# EAGLE board Proxmark3_Shield (EAGLE 5.11)
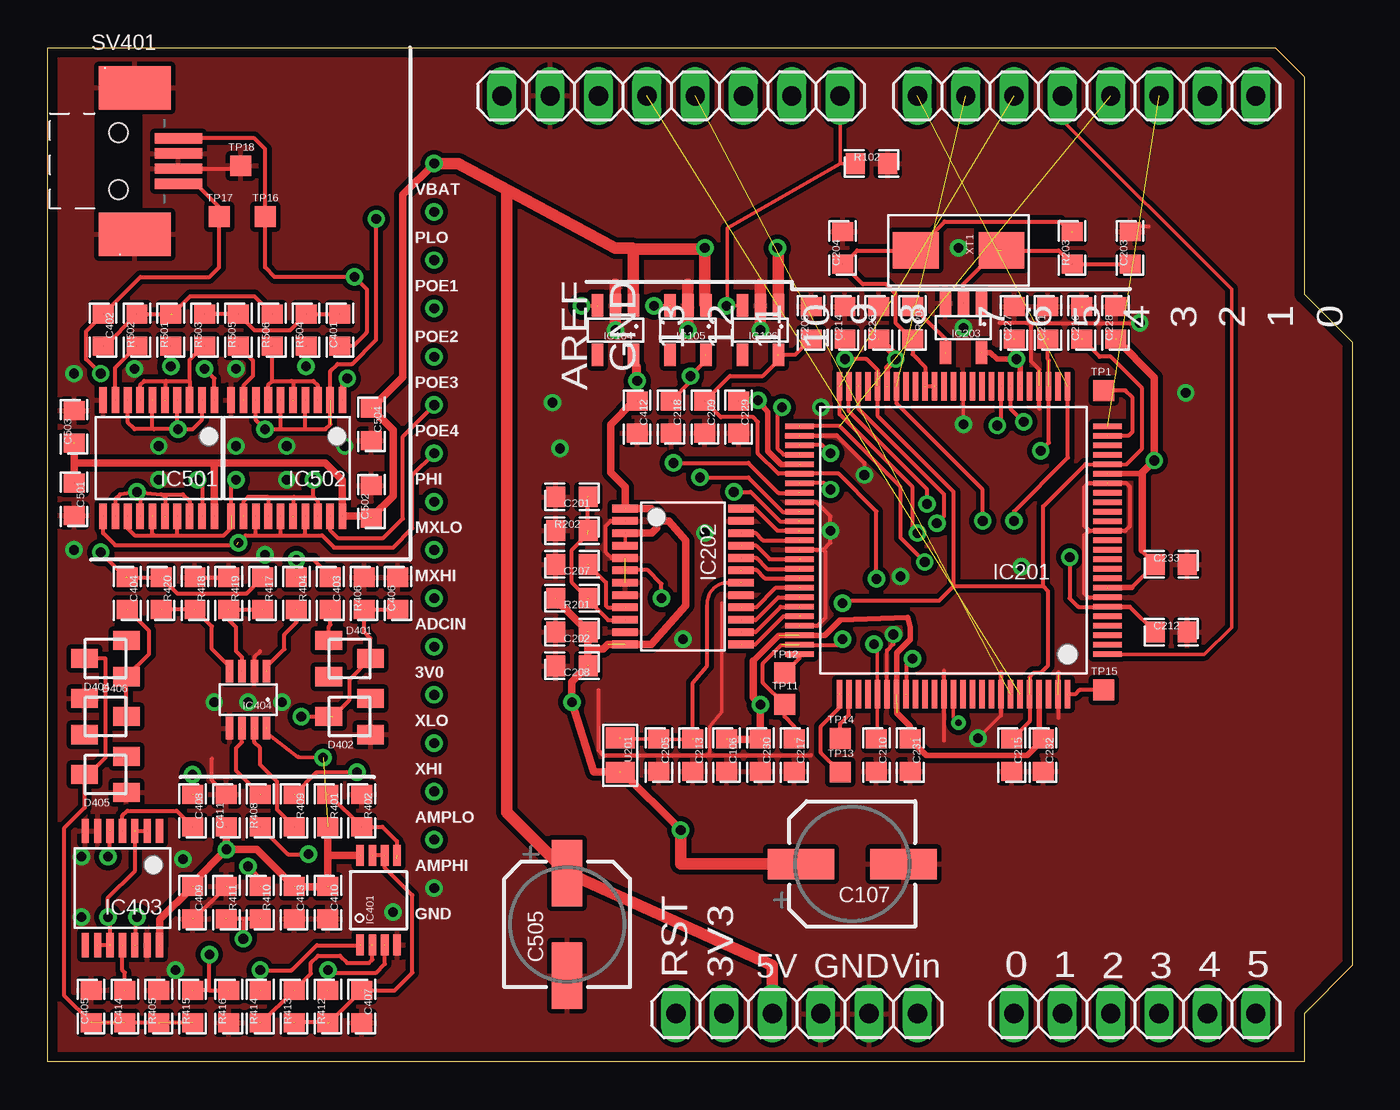
[diagram p0: board, top side]
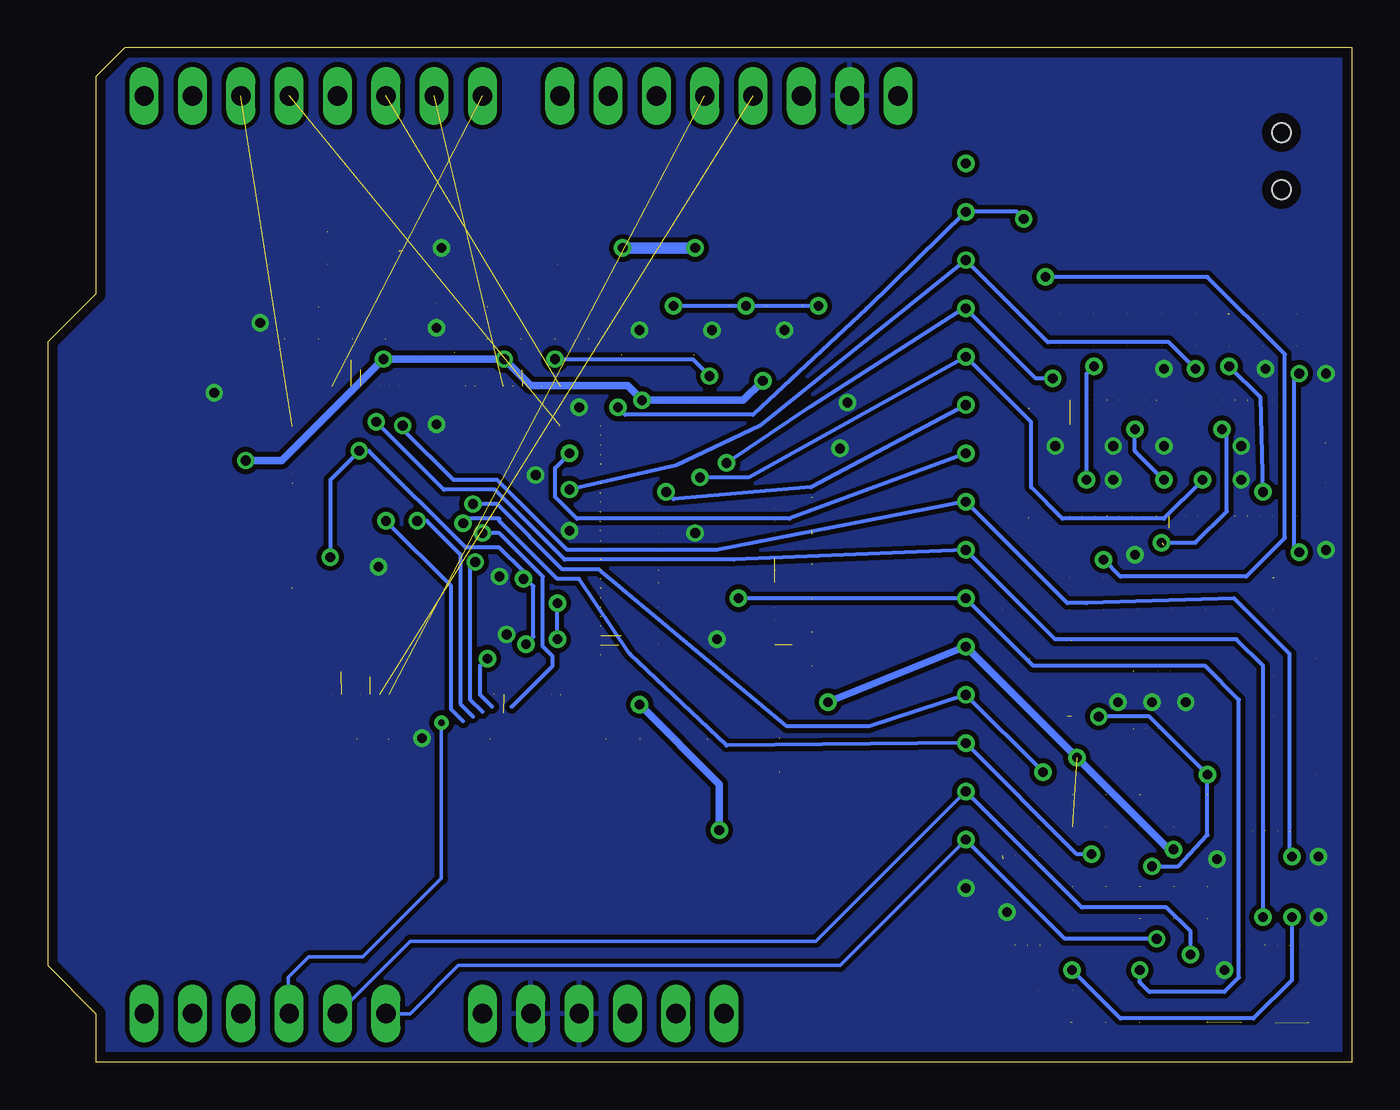
[diagram p1: board, bottom side, seen from below]

Size 68.58 x 53.34 mm. Coordinates in mm from the lower left corner, seen from the top.
Outline: 0,53.34 64.52,53.34 66.04,51.82 66.04,40.39 68.58,37.85 68.58,5.08 66.04,2.54 66.04,0 0,0 0,53.34
Copper layers (1*16): Top 0.0356mm / dielectric 1.5011mm / Bottom 0.0356mm
Design rules "SilverCircuits": minimum track width 7mil, minimum drill 14mil, track to track 7mil, track to pad 7mil, pad to pad 7mil, via to via 7mil, smd to smd 0mil, copper to edge 20mil, drill to drill 8mil, minimum pad ring 10mil, minimum via ring 8mil, stop-mask expansion 4mil, vias tented up to drill 0mil, thermal gap 10mil
Net classes: 1 power: width 0.305 mm

## Footprints (pad centres in the part's own frame; a part is rotated, then mirrored left to right if it is on the bottom)
0603 = smd 1 x 1.1: 1 -0.85,0; 2 0.85,0
153CLV-0605 = smd 3.5 x 1.6: + 2.7,0; - -2.7,0
SOT-23-3 = smd 1 x 1.4: 1 -0.95,-1.1; 2 0.95,-1.1; 3 0,1.1
SOT-23-5 = smd 0.6 x 1.2: 1 -0.95,-1.3; 2 0,-1.3; 3 0.95,-1.3; 4 0.95,1.3; 5 -0.95,1.3
VQ100 = smd 1.5 x 0.29: 1 -8.1,6; 2 -8.1,5.5; 3 -8.1,5; 4 -8.1,4.5; 5 -8.1,4; 6 -8.1,3.5; 7 -8.1,3; 8 -8.1,2.5; 9 -8.1,2; 10 -8.1,1.5; 11 -8.1,1; 12 -8.1,0.5; 13 -8.1,0; 14 -8.1,-0.5; 15 -8.1,-1; 16 -8.1,-1.5; 17 -8.1,-2; 18 -8.1,-2.5; 19 -8.1,-3; 20 -8.1,-3.5; 21 -8.1,-4; 22 -8.1,-4.5; 23 -8.1,-5; 24 -8.1,-5.5; 25 -8.1,-6; 51 8.1,-6; 52 8.1,-5.5; 53 8.1,-5; 54 8.1,-4.5; 55 8.1,-4; 56 8.1,-3.5; 57 8.1,-3; 58 8.1,-2.5; 59 8.1,-2; 60 8.1,-1.5; 61 8.1,-1; 62 8.1,-0.5; 63 8.1,0; 64 8.1,0.5; 65 8.1,1; 66 8.1,1.5; 67 8.1,2; 68 8.1,2.5; 69 8.1,3; 70 8.1,3.5; 71 8.1,4; 72 8.1,4.5; 73 8.1,5; 74 8.1,5.5; 75 8.1,6 | smd 0.29 x 1.5: 26 -6,-8.1; 27 -5.5,-8.1; 28 -5,-8.1; 29 -4.5,-8.1; 30 -4,-8.1; 31 -3.5,-8.1; 32 -3,-8.1; 33 -2.5,-8.1; 34 -2,-8.1; 35 -1.5,-8.1; 36 -1,-8.1; 37 -0.5,-8.1; 38 0,-8.1; 39 0.5,-8.1; 40 1,-8.1; 41 1.5,-8.1; 42 2,-8.1; 43 2.5,-8.1; 44 3,-8.1; 45 3.5,-8.1; 46 4,-8.1; 47 4.5,-8.1; 48 5,-8.1; 49 5.5,-8.1; 50 6,-8.1; 76 6,8.1; 77 5.5,8.1; 78 5,8.1; 79 4.5,8.1; 80 4,8.1; 81 3.5,8.1; 82 3,8.1; 83 2.5,8.1; 84 2,8.1; 85 1.5,8.1; 86 1,8.1; 87 0.5,8.1; 88 0,8.1; 89 -0.5,8.1; 90 -1,8.1; 91 -1.5,8.1; 92 -2,8.1; 93 -2.5,8.1; 94 -3,8.1; 95 -3.5,8.1; 96 -4,8.1; 97 -4.5,8.1; 98 -5,8.1; 99 -5.5,8.1; 100 -6,8.1
TSSOP24 = smd 0.4 x 1.35: 1 -3.575,-3.05; 2 -2.925,-3.05; 3 -2.275,-3.05; 4 -1.625,-3.05; 5 -0.975,-3.05; 6 -0.325,-3.05; 7 0.325,-3.05; 8 0.975,-3.05; 9 1.625,-3.05; 10 2.275,-3.05; 11 2.925,-3.05; 12 3.575,-3.05; 13 3.575,3.05; 14 2.925,3.05; 15 2.275,3.05; 16 1.625,3.05; 17 0.975,3.05; 18 0.325,3.05; 19 -0.325,3.05; 20 -0.975,3.05; 21 -1.625,3.05; 22 -2.275,3.05; 23 -2.925,3.05; 24 -3.575,3.05
MSOP8 = smd 0.4 x 1.1: 1 -0.975,-2.35; 2 -0.325,-2.35; 3 0.325,-2.35; 4 0.975,-2.35; 5 0.975,2.35; 6 0.325,2.35; 7 -0.325,2.35; 8 -0.975,2.35
TSSOP14 = smd 0.381 x 1.27: 1 -1.95,-3; 2 -1.3,-3; 3 -0.65,-3; 4 0,-3; 5 0.65,-3; 6 1.3,-3; 7 1.95,-3; 8 1.95,3; 9 1.3,3; 10 0.65,3; 11 0,3; 12 -0.65,3; 13 -1.3,3; 14 -1.95,3
SOT-23-8 = smd 0.4 x 1.2: 1 -0.975,-1.5; 2 -0.325,-1.5; 3 0.325,-1.5; 4 0.975,-1.5; 5 0.975,1.5; 6 0.325,1.5; 7 -0.325,1.5; 8 -0.975,1.5
TSSOP20 = smd 0.4 x 1.35: 1 -2.925,-3.05; 2 -2.275,-3.05; 3 -1.625,-3.05; 4 -0.975,-3.05; 5 -0.325,-3.05; 6 0.325,-3.05; 7 0.975,-3.05; 8 1.625,-3.05; 9 2.275,-3.05; 10 2.925,-3.05; 11 2.925,3.05; 12 2.275,3.05; 13 1.625,3.05; 14 0.975,3.05; 15 0.325,3.05; 16 -0.325,3.05; 17 -0.975,3.05; 18 -1.625,3.05; 19 -2.275,3.05; 20 -2.925,3.05
HIROSE-MQ172 = smd 0.55 x 2.5: 1 -1.2,6.75; 2 -0.4,6.75; 3 0.4,6.75; 4 1.2,6.75 | smd 2.3 x 3.8: M1 3.85,4.45; M2 -3.85,4.45 | hole 1: 1.5,3.6; -1.5,3.6
TP06SQ = smd 1.1 x 1.1: TP 0,0
0805 = smd 1.1 x 1.5: 1 -0.9,0; 2 0.9,0
1X06 = drill 1.016 long: 1 -6.35,0; 2 -3.81,0; 3 -1.27,0; 4 1.27,0; 5 3.81,0; 6 6.35,0
1X08 = drill 1.016 long: 1 -8.89,0; 2 -6.35,0; 3 -3.81,0; 4 -1.27,0; 5 1.27,0; 6 3.81,0; 7 6.35,0; 8 8.89,0
6035 = smd 2.4 x 1.9: 1 -2.25,0; 2 2.25,0

## Placement (x,y rotation side)
C106  4u7  [0603]  35.69,16.13 270 top
C107  100u  [153CLV-0605]  42.29,10.41 180 top
C201  DNP  [0603]  27.56,29.72 180 top
C202  1u  [0603]  27.56,22.61 180 top
C203  22p  [0603]  56.9,42.8 90 top
C204  22p  [0603]  41.78,42.8 90 top
C205  1u  [0603]  32.13,16.13 270 top
C206  4u7  [0603]  40.13,38.86 90 top
C207  100n  [0603]  27.56,26.16 180 top
C208  100n  [0603]  27.56,20.83 180 top
C209  100n  [0603]  34.54,33.91 270 top
C210  100n  [0603]  43.56,16.13 270 top
C211  100n  [0603]  52.58,38.86 90 top
C212  100n  [0603]  59.05,22.61 0 top
C213  100n  [0603]  33.91,16.13 270 top
C214  100n  [0603]  41.91,38.86 90 top
C215  100n  [0603]  50.67,16.13 270 top
C216  100n  [0603]  54.36,38.86 90 top
C217  100n  [0603]  39.24,16.13 270 top
C218  4u7  [0603]  32.77,33.91 270 top
C226  100n  [0603]  43.69,38.86 90 top
C227  100n  [0603]  50.8,38.86 90 top
C228  100n  [0603]  56.13,38.86 90 top
C229  100n  [0603]  36.32,33.91 270 top
C230  100n  [0603]  37.47,16.13 270 top
C231  100n  [0603]  45.34,16.13 270 top
C232  100n  [0603]  52.32,16.13 270 top
C233  100n  [0603]  59.05,26.16 0 top
C401  1n  [0603]  15.37,38.48 90 top
C402  47p  [0603]  2.92,38.48 270 top
C403  0R  [0603]  14.86,24.64 270 top
C404  22p  [0603]  4.19,24.64 270 top
C405  130p  [0603]  2.29,2.92 90 top
C406  1n  [0603]  18.41,24.64 90 top
C407  1u  [0603]  16.51,2.92 270 top
C408  1n  [0603]  7.62,13.21 270 top
C409  100n  [0603]  7.62,8.38 270 top
C410  100n  [0603]  14.73,8.38 270 top
C411  100n  [0603]  9.4,13.21 90 top
C412  4u7  [0603]  30.99,33.91 270 top
C413  4u7  [0603]  12.95,8.38 270 top
C414  1n  [0603]  4.06,2.92 90 top
C501  100n  [0603]  1.4,29.59 270 top
C502  100n  [0603]  17.02,29.46 90 top
C503  4u7  [0603]  1.4,33.4 90 top
C504  4u7  [0603]  17.02,33.53 270 top
C505  100u  [153CLV-0605]  27.3,7.24 90 top
D401  BAS21  [SOT-23-3]  15.88,21.21 270 top
D402  BZX84C47  [SOT-23-3]  15.88,18.16 90 top
D404  BAR18  [SOT-23-3]  3.05,21.21 90 top
D405  BZX84C47  [SOT-23-3]  3.05,15.11 90 top
D406  BAR18  [SOT-23-3]  3.05,18.16 270 top
IC104  MCP1824T-300  [SOT-23-5]  29.84,38.48 180 top
IC105  MCP1824T-250  [SOT-23-5]  33.66,38.48 180 top
IC106  MCP1824T-120  [SOT-23-5]  37.47,38.48 180 top
IC201  XC3S250EVQ100  [VQ100]  47.61,27.43 180 top
IC202  ADC08060  [TSSOP24]  33.4,25.53 270 top
IC203  7404  [SOT-23-5]  48.13,38.61 180 top
IC401  AD8052  [MSOP8]  17.4,8.51 0 top
IC403  CD4066  [TSSOP14]  3.94,9.14 180 top
IC404  TLV3502  [SOT-23-8]  10.54,19.05 180 top
IC501  74AC244  [TSSOP20]  5.84,31.75 180 top
IC502  74AC244  [TSSOP20]  12.57,31.75 180 top
R102  10k  [0603]  43.31,47.24 0 top
R201  DNP  [0603]  27.56,24.38 180 top
R202  0R  [0603]  27.56,27.94 0 top
R203  1M  [0603]  53.85,42.8 90 top
R204  100R  [0603]  45.47,38.86 270 top
R401  100K  [0603]  14.73,13.21 270 top
R402  100K  [0603]  16.51,13.21 270 top
R404  240K  [0603]  13.08,24.64 270 top
R405  10k  [0603]  5.84,2.92 90 top
R406  510K  [0603]  16.64,24.64 90 top
R408  1K  [0603]  11.18,13.21 90 top
R409  1K  [0603]  12.95,13.21 270 top
R410  10M  [0603]  11.18,8.38 270 top
R411  240K  [0603]  9.4,8.38 270 top
R412  100K  [0603]  14.73,2.92 90 top
R413  10K  [0603]  12.95,2.92 90 top
R414  10K  [0603]  11.18,2.92 90 top
R415  10M  [0603]  7.62,2.92 90 top
R416  1M  [0603]  9.53,2.92 90 top
R417  240K  [0603]  11.3,24.64 270 top
R418  0R  [0603]  7.75,24.64 270 top
R419  0R  [0603]  9.53,24.64 270 top
R420  240K  [0603]  5.97,24.64 270 top
R501  33R  [0603]  6.48,38.48 90 top
R502  10K  [0603]  4.7,38.48 90 top
R503  33R  [0603]  8.26,38.48 90 top
R504  33R  [0603]  13.59,38.48 90 top
R505  10K  [0603]  10.03,38.48 90 top
R506  33R  [0603]  11.81,38.48 90 top
SV401  HIROSE  [HIROSE-MQ172]  0.13,47.37 270 top
TP1  TPTP06SQ  [TP06SQ]  55.5,35.31 0 top
TP11  TPTP06SQ  [TP06SQ]  38.73,18.8 0 top
TP12  TPTP06SQ  [TP06SQ]  38.73,20.45 0 top
TP13  TPTP06SQ  [TP06SQ]  41.66,15.24 0 top
TP14  TPTP06SQ  [TP06SQ]  41.66,17.02 0 top
TP15  TPTP06SQ  [TP06SQ]  55.5,19.56 0 top
TP16  TPTP06SQ  [TP06SQ]  11.43,44.45 0 top
TP17  TPTP06SQ  [TP06SQ]  9.02,44.45 0 top
TP18  TPTP06SQ  [TP06SQ]  10.16,47.12 0 top
U201  FB  [0805]  30.1,16.13 270 top
U$1  POWER  [1X06]  39.37,2.54 0 top
U$3  DIGITAL_0_7  [1X08]  54.61,50.8 0 top
U$4  DIGITAL_8_13  [1X08]  32.77,50.8 0 top
WIN3  ANALOG  [1X06]  57.15,2.54 0 top
XT1  13.56MHz  [6035]  47.88,42.67 180 top

## Library data of the parts
C106 C107 C201-C218 C226-C233 C401-C414 C501-C505 D401 D402 D404-D406 IC104-IC106 IC201-IC203 IC401 IC403 IC404 IC501 IC502 R102 R201-R204 R401 R402 R404-R406 R408-R420 R501-R506 SV401 TP1 TP11-TP18 U201 XT1 = proxmark
U$1 U$3 U$4 WIN3 = arduino

## Nets
13.56MHZ: C204.1 IC201.40 IC201.41 R203.2 R204.2 XT1.2
+1V2: C206.1 C209.1 C210.1 C211.1 C212.1 IC106.5 IC201.6 IC201.28 IC201.56 IC201.80
+2V5: C214.1 C215.1 C216.1 C217.1 C218.1 IC105.5 IC201.21 IC201.46 IC201.74 IC201.96 TP11.TP
+3V0: C106.1 C107.+ C202.1 C208.1 C226.1 C227.1 C228.1 C229.1 C230.1 C231.1 C232.1 C233.1 C409.1 C410.1 C411.1 C412.1 C413.1 IC104.5 IC201.8 IC201.20 IC201.31 IC201.45 IC201.55 IC201.73 IC201.82 IC201.97 IC202.1 IC202.3 IC202.4 IC202.12 IC203.5 IC401.8 IC403.14 IC404.8 R201.2 R401.2 U201.2
+VBAT [power]: C501.1 C502.1 C503.1 C504.1 C505.+ IC104.1 IC105.1 IC106.1 IC501.20 IC502.20 U$1.3
+VBIAS: C407.1 IC401.6 IC401.7 R412.1 R413.1
ADC0: IC201.63 IC202.22
ADC1: IC201.65 IC202.21
ADC2: IC201.66 IC202.20
ADC3: IC201.67 IC202.19
ADC4: IC201.68 IC202.16
ADC5: IC201.69 IC202.15
ADC6: IC201.70 IC202.14
ADC7: IC201.71 IC202.13
ADC_CLK: IC201.62 IC202.24
ADC_IN: IC202.6 IC401.1 R414.2
ADCDR_HI: C405.1 C414.1 D404.3 D405.3 R405.1 R415.1
ADCDR_LO: C406.1 C408.1 D401.3 D402.3 R406.1 R410.1
AMP_HI: R415.2 R416.2 WIN3.2
AMP_LO: R410.2 R411.2 WIN3.1
ANT_HI_DRV: C402.2 R501.2 R502.2 R506.2
ANT_LO_DRV: C401.2 R503.2 R504.2 R505.2
CROSS_HI: IC201.48 R408.1
CROSS_LO: IC201.49 R409.1
DEBUG: IC201.24 TP1.TP
FPGA_CCLK: IC201.50 U$3.3
FPGA_DIN: IC201.44 U$3.2
FPGA_DONE: IC201.51 U$3.5
FPGA_DOUT: IC201.26 U$3.1
FPGA_INITB: IC201.25 U$3.6
FPGA_PROGB: IC201.1 U$3.4
FPGA_TCK: IC201.77 TP14.TP
FPGA_TDI: IC201.100 TP15.TP
FPGA_TDO: IC201.76 TP13.TP
FPGA_TMS: IC201.75 TP12.TP
GND: C106.2 C107.- C201.2 C202.2 C203.2 C204.2 C205.2 C206.2 C207.2 C208.2 C209.2 C210.2 C211.2 C212.2 C213.2 C214.2 C215.2 C216.2 C217.2 C218.2 C226.2 C227.2 C228.2 C229.2 C230.2 C231.2 C232.2 C233.2 C405.2 C406.2 C407.2 C409.2 C410.2 C411.2 C412.2 C413.2 C501.2 C502.2 C503.2 C504.2 C505.- D402.1 D405.1 D406.1 IC104.2 IC105.2 IC106.2 IC201.7 IC201.14 IC201.19 IC201.29 IC201.37 IC201.52 IC201.59 IC201.64 IC201.72 IC201.81 IC201.87 IC201.93 IC201.99 IC202.2 IC202.5 IC202.7 IC202.8 IC202.11 IC202.17 IC202.23 IC203.3 IC401.4 IC403.6 IC403.7 IC403.13 IC404.2 IC404.5 IC501.10 IC502.10 R102.2 R202.1 R402.1 R405.2 R406.2 R411.1 R416.1 R418.1 R419.1 SV401.2 SV401.3 SV401.M1 SV401.M2 TP18.TP U$1.4 U$1.5 U$4.2
MISO: IC201.95 U$4.4
MOSI: IC201.94 U$4.5
MUX_HI: IC201.32 IC403.12
MUX_LO: IC201.33 IC403.5
N$1: C207.1 IC202.9
N$3: IC203.4 R204.1
N$4: C203.1 IC203.2 R203.1 XT1.1
N$9: C201.1 IC202.10 R201.1 R202.2
N$11: U$3.7
N$14: IC401.5 R401.1 R402.2
N$16: C414.2 IC403.11
N$17: C401.1 C403.1 R404.1 SV401.1 TP16.TP
N$20: C404.2 D404.1 D406.3
N$23: IC404.1 R404.2
N$24: IC404.7 R409.2
N$25: IC401.3 IC403.2 IC403.3 IC403.9 IC403.10 R412.2
N$28: IC404.6 R408.2
N$29: IC404.3 R417.2 R419.2
N$30: C403.2 D401.1
N$32: C408.2 IC403.4
N$33: IC501.12 IC501.14 IC501.16 IC501.18 R501.1
N$34: IC502.12 IC502.14 IC502.16 IC502.18 R504.1
N$40: IC404.4 R418.2 R420.2
N$41: IC501.3 IC501.5 IC501.7 R503.1
N$42: IC502.3 IC502.5 IC502.7 R506.1
N$43: C402.1 C404.1 R417.1 R420.1 SV401.4 TP17.TP
N$44: IC501.9 R502.1
N$45: IC502.9 R505.1
N$52: IC401.2 R413.2 R414.1
NCS0: IC201.91
PCK0: IC201.88 WIN3.3
PWR_HI: IC201.53 IC501.2 IC501.4 IC501.6 IC501.8 IC501.11 IC502.13 IC502.15 IC502.17
PWR_LO: IC201.54 IC501.13 IC501.15 IC501.17 IC502.2 IC502.4 IC502.6 IC502.8 IC502.11
PWR_OE1: IC201.57 IC501.1
PWR_OE2: IC201.58 IC502.1
PWR_OE3: IC201.60 IC501.19
PWR_OE4: IC201.61 IC502.19
PWR_ON: IC104.3 IC105.3 IC106.3 R102.1 U$4.8
SCK: U$4.3
SPCK: IC201.90
SS: U$4.6
SSP_CLK: IC201.85
SSP_DIN: IC201.83
SSP_DOUT: IC201.79
SSP_FRAME: IC201.84
VDD: C205.1 C213.1 IC202.18 U201.1

## Tracks (layer width: path | path; a pad name or v marks a point on that pad's centre or on a via)
13.56MHZ  (6 unrouted)
  Top 0.203: 46.63,35.53 46.13,35.53 46.13,36.55 45.47,37.21 45.47,38.02 45.41,38.02 44.58,38.86 44.58,40.39 44.07,40.89 42.85,40.89 C204.1 41.83,41.96 42.55,42.67 45.62,42.67 47.14,44.2 53.21,44.2 53.77,43.64 53.85,43.64
+1V2  (via drill 0.51)  (5 unrouted)
  Top 0.178: IC201.56 39.37,30.94 | C210.1 43.61,16.98 IC201.80 43.61,21.79 arc90 v43.43,21.97
  Top 0.203: 38.41,37.19 39.29,37.19 40.13,38.02 40.18,38.02 | 38.41,37.19 38.38,37.21 | v43.43,21.97 43.64,21.77 | v53.72,26.54 53.72,24.38 54.18,23.93 56.88,23.93 | v52.2,32.13 52.63,32.56 52.63,36.91 52.58,36.96 52.58,38.02 | v43.56,25.4 43.56,28.96 41.58,30.94 39.37,30.94 38.41,30.94 37.34,32 37.34,33.66 37.08,33.91 35.38,33.91 34.54,34.75 35.87,36.07 37.59,36.07 38.41,36.88 38.41,37.19 | 56.88,23.93 C212.1 | IC201.6 56.88,23.93
  Bottom 0.203: v53.72,26.54 53.72,30.61 v52.2,32.13 51.69,32.13 46.61,27.05 44.83,27.05 43.56,25.78 v43.56,25.4 43.05,25.02 43.05,22.35 v43.43,21.97
+2V5  (via drill 0.51)  (9 unrouted)
  Top 0.178: 54.53,31.42 56.69,31.42 IC201.21
  Top 0.203: 50.67,16.97 51.61,17.91 51.61,20.24 51.82,20.45 52.2,20.45 52.58,20.83 52.58,24.77 52.32,25.02 | 54.53,38.02 54.36,38.02 55.3,37.08 55.88,37.08 57.53,35.43 57.53,32.26 56.69,31.42 | v41.78,22.23 41.48,21.92 38.56,21.92 37.59,20.95 37.59,19.94 TP11.TP 38.73,18.16 39.24,17.65 39.24,16.97 | 54.53,31.42 52.32,29.21 52.32,25.02 | 47.62,25.02 52.32,25.02 | 47.62,25.02 47.62,29.97 43.64,33.96 43.64,36.37 43.05,36.96 v41.91,36.96 41.91,38.02 | 32.77,34.75 33.78,35.76 v33.78,36.07 34.59,36.88 34.59,37.19 | 47.62,25.02 46.86,24.26 42.04,24.26 v41.78,24.13
  Bottom 0.203: v41.78,22.23 v41.78,24.13 | v41.91,36.96 34.67,36.96 v33.78,36.07
+3V0  (via drill 0.51)  (34 unrouted)
  Top 0.178: 30.35,27.81 IC202.3 IC202.4 | v30.99,35.81 30.8,36.01 IC104.5
  Top 0.203: 52.32,16.97 52.12,17.17 | 11.51,17.55 11.51,17.32 13.16,16.05 v14.48,16 | 56.97,24.94 56.99,24.94 C233.1 57.53,26.84 57.53,26.92
  Top 0.279: 52.32,16.97 51.49,16.13 46.18,16.13 45.34,16.97 45.34,17.65 44.63,18.36 44.63,21.51 45.34,22.23 45.34,22.86 45.21,23.37 41.66,23.24 40.84,22.43 38.43,22.43 37.08,21.08 | 52.12,17.17 52.12,19.33 | 44.12,36.5 IC201.45 | 51.13,36.75 51.13,35.53 | 56.97,24.94 55.73,24.94 | 39.52,31.42 38.56,31.42 37.85,32.13 37.85,34.16 37.39,34.75 | v37.34,34.8 37.39,34.75 | IC203.5 49.55,37.31 49.91,36.96 v50.93,36.96 | 37.39,34.75 36.32,34.75 | 57.48,30.94 55.73,30.94
  Top 0.305: v44.58,36.96 44.12,36.5
  Top 0.406: 50.8,38.02 50.8,37.08 v50.93,36.96 51.13,36.75 | 37.08,21.08 37.08,19.18 v37.47,18.8 37.47,16.97 35.69,16.97 | 30.35,27.81 31.75,27.81 32,28.07 32,28.45 | 32,28.45 32,28.83 31.73,29.11 IC202.1 30.35,30.23 29.59,30.99 29.59,33.53 30.81,34.75 30.99,34.75 v30.99,35.81 30.99,36.58 30.79,36.78 IC104.5 | 56.13,38.02 58.17,35.99 v58.17,31.62 57.53,30.99 | R201.2 26.72,24.31 28.4,22.63 28.4,21.72 | 28.4,21.72 28.4,20.83 27.56,19.99 v27.56,18.92 28.7,15.24 U201.2 30.1,15.37 v33.27,12.19 | 28.4,21.72 29.21,21.72 29.44,21.95 31.73,21.95 33.53,24 33.53,27.43 32.64,28.45 32,28.45 | v44.58,36.96 44.58,37.13 43.69,38.02 | IC403.14 5.89,7.49 C409.1 7.62,9.4 v9.4,11.18 | 14.73,10.79 C410.1 C413.1 11,11.18 v9.4,11.18 | 14.73,10.79 R401.2 | 16.43,10.87 14.81,10.87 14.73,10.79 | v9.4,11.18 C411.1 | 57.53,30.99 57.53,26.92 | 57.53,30.99 57.48,30.94
  Top 0.61: C107.+ 33.27,10.41 v33.27,12.19
  Bottom 0.406: v58.17,31.62 56.26,31.62 v50.93,36.96 v44.58,36.96 43.18,35.56 38.1,35.56 v37.34,34.8 32,34.8 v30.99,35.81 | v33.27,12.19 33.27,14.61 v37.47,18.8 | v27.56,18.92 v20.32,21.84 9.65,11.18 v9.4,11.18
+VBAT  (via drill 0.51)  (8 unrouted)
  Top 0.305: 14.61,31.5 8.89,31.5 arc90 8.76,31.37 | 30.73,42.8 arc-90 30.79,42.75 | 34.49,42.75 arc90 v34.54,42.8 | 34.54,39.84 arc90 IC105.1 | 24.13,45.72 24.2,45.78 24.2,45.84
  Top 0.406: 1.4,30.43 1.4,31.5 | 1.4,31.5 1.4,32.56 | v20.32,47.24 18.67,45.59 18.67,36.02 17.02,34.37 18.16,33.22 18.16,29.77 17.02,28.63 16.94,28.7 IC502.20 15.49,30.61 14.61,31.5 1.4,31.5 | v38.35,42.8 38.41,42.75 | 8.76,31.37 IC501.20
  Top 0.61: IC104.1 30.79,42.75 34.49,42.75 | 38.41,42.75 38.41,39.78 | v20.32,47.24 21.59,47.24 24.2,45.84 29.84,42.8 30.73,42.8 | U$1.3 38.1,5.08 C505.+ 24.13,13.11 24.13,45.72 | v34.54,42.8 34.54,39.84
  Bottom 0.61: v34.54,42.8 v38.35,42.8
+VBIAS  (5 unrouted)
  Top 0.203: 17.07,10.87 17.73,10.87 17.73,10.21 19.18,8.76 19.18,4.7 18.24,3.76 16.51,3.76 14.83,2.08 12.95,2.08
ADC0  (2 unrouted)
  Top 0.203: 39.52,27.43 37.59,27.43 37.21,27.81 36.45,27.81
ADC1  (2 unrouted)
  Top 0.203: 39.52,26.44 37.95,26.44 37.24,27.15 IC202.21
ADC2  (2 unrouted)
  Top 0.203: 39.52,25.93 37.82,25.93 37.26,26.49 IC202.20
ADC3  (2 unrouted)
  Top 0.203: 39.52,25.43 37.69,25.43 37.26,25.86 IC202.19
ADC4  (2 unrouted)
  Top 0.203: 39.52,24.94 38.28,24.94 37.24,23.9 IC202.16
ADC5  (2 unrouted)
  Top 0.203: 39.52,24.43 38.41,24.43 37.21,23.24 IC202.15
ADC6  (2 unrouted)
  Top 0.203: 39.52,23.93 38.53,23.93 37.21,22.61 IC202.14
ADC7  (2 unrouted)
  Top 0.203: 39.52,23.44 38.68,23.44 37.19,21.95 IC202.13
ADC_CLK  (2 unrouted)
  Top 0.203: 39.52,27.94 38.35,27.94 37.19,29.11 IC202.24
ADC_IN  (via drill 0.51)  (3 unrouted)
  Top 0.203: IC202.6 31.55,25.86 32.26,25.15 v32.26,24.38 | 11.18,3.76 v11.18,4.83 12.83,4.83 14.15,6.15 16.43,6.15
  Bottom 0.203: v11.18,4.83 11.18,4.19 10.67,3.68 6.73,3.68 5.97,4.45 5.97,19.05 7.75,20.83 16.76,20.83 v20.32,24.38 v32.26,24.38
ADCDR_HI  (6 unrouted)
  Top 0.203: D404.3 3.05,21.21 3.05,16 2.16,15.11 D405.3 1.96,13.39 0.89,12.32 0.89,3.48 2.29,2.08 7.62,2.08
ADCDR_LO  (via drill 0.51)  (6 unrouted)
  Top 0.203: v13.34,18.16 14.99,18.16 15.88,19.05 15.88,20.12 16.97,21.21 | C406.1 R406.1 16.64,22.61 16.97,22.28 16.97,21.21 | 16.97,21.21 17.02,21.26 16.84,21.26 | v7.62,15.11 7.62,14.05 | R410.1 11.18,9.65 v10.54,10.29
  Bottom 0.203: v13.34,18.16 10.67,18.16 v7.62,15.11 7.62,11.94 9.14,10.29 v10.54,10.29
AMP_HI  (via drill 0.51)  (2 unrouted)
  Top 0.203: 8.51,3.76 9.53,3.76 | 8.51,3.76 7.62,3.76 | 8.51,3.76 v8.51,5.65
  Bottom 0.178: v20.32,14.22 28.19,6.35 49.53,6.35 WIN3.2
  Bottom 0.203: v8.51,5.65 8.51,6.86 9.78,8.13 14.22,8.13 v20.32,14.22
AMP_LO  (via drill 0.51)  (2 unrouted)
  Top 0.203: 9.4,7.54 10.29,7.54 | 10.29,7.54 11.18,7.54 | 10.29,7.54 v10.29,6.48
  Bottom 0.178: v20.32,11.68 26.92,5.08 46.99,5.08 49.53,2.54 WIN3.1
  Bottom 0.203: v20.32,11.68 15.11,6.48 v10.29,6.48
ANT_HI_DRV  (4 unrouted)
  Top 0.203: R506.2 10.87,40.26 7.49,40.26 6.55,39.32 R502.2 3.02,37.64 2.92,37.64
ANT_LO_DRV  (4 unrouted)
  Top 0.203: R503.2 R505.2 10.87,38.48 12.75,38.48 R504.2 C401.2
CROSS_HI  (via drill 0.51)  (2 unrouted)
  Top 0.203: 42.62,35.53 42.62,34.34 47.12,29.84 47.12,28.7 v46.74,28.32 | R408.1 12.62,10.92 v13.72,10.92
  Bottom 0.203: v46.74,28.32 46.48,28.57 44.83,28.57 44.83,28.45 41.78,25.4 40.64,25.4 37.97,21.46 32.89,16.64 v20.32,16.76 14.48,10.92 v13.72,10.92
CROSS_LO  (via drill 0.51)  (2 unrouted)
  Top 0.203: IC201.49 42.11,34.21 46.23,30.1 v46.23,29.34 | v16.26,15.24 14.15,15.24 12.95,14.05
  Bottom 0.203: v46.23,29.34 44.96,29.34 41.53,25.91 39.62,25.91 29.72,17.65 25.4,17.65 v20.32,19.3 v16.26,15.24
DEBUG  (1 unrouted)
  Top 0.203: 55.73,32.94 56.82,32.94 57.02,33.15 57.02,34.92 56.64,35.31 TP1.TP
FPGA_CCLK  (via drill 0.51)  (2 unrouted)
  Top 0.203: 41.63,35.53 41.63,34.06 45.47,30.23 45.47,28.07 v45.72,27.81
  Bottom 0.203: v45.72,27.81 44.83,27.81 42.55,25.53 42.55,21.84 42.04,21.34 42.04,20.83 44.2,18.67
FPGA_DIN  (via drill 0.51)  (2 unrouted)
  Top 0.203: v49.15,28.45 49.15,30.1 44.63,34.62 44.63,35.53
  Bottom 0.203: 46.23,18.16 46.86,18.8 46.86,26.67 48.64,28.45 v49.15,28.45
FPGA_DONE  (via drill 0.51)  (2 unrouted)
  Top 0.203: v46.1,26.29 44.83,27.56 44.83,30.23 41.63,33.43 39.52,33.43
  Bottom 0.203: v46.1,26.29 46.35,26.04 46.35,19.05 45.72,18.41
FPGA_DOUT  (via drill 0.51)  (2 unrouted)
  Top 0.203: v50.8,28.45 50.8,28.96 53.62,31.77 IC201.26
  Bottom 0.203: 46.74,17.91 47.37,18.54 47.37,25.02 v50.8,28.45
FPGA_INITB  (1 unrouted)
FPGA_PROGB
  Top 0.178: IC201.1 60.8,21.43 62.23,22.86 62.23,40.64 53.34,49.53 U$3.4
FPGA_TCK  (1 unrouted)
  Top 0.203: IC201.77 42.11,18.24 41.66,17.78 TP14.TP
FPGA_TDI  (1 unrouted)
  Top 0.203: TP15.TP 54.23,19.56 54,19.33 IC201.100
FPGA_TDO  (1 unrouted)
  Top 0.203: TP13.TP 40.64,16.26 40.64,17.65 41.63,18.64 41.63,19.33
FPGA_TMS  (1 unrouted)
  Top 0.203: 39.52,21.44 39.52,21.23 TP12.TP
GND  (via drill 0.51)  (12 unrouted)
  Top 0.178: v48.9,17.02 50.09,18.21 50.11,18.21 IC201.93 | IC201.87 47.12,20.32 | 44.12,21.64 44.11,21.63 IC201.81 | v48.13,33.53 48.13,35.51 arc90 IC201.37 | IC201.7 54.69,24.43 | IC202.17 35.98,24.55 | 35.43,24.13 35.43,18.41 34.8,17.65 34.8,16.26 34.67,16.13
  Top 0.203: 39.52,29.44 40.41,29.44 41.15,28.7 41.15,27.3 40.77,26.92 | 40.77,26.92 39.52,26.92 | 39.52,32.94 41.48,32.94 42.93,31.5 v42.93,30.86 | v44.45,22.48 44.45,21.97 44.12,21.64 | 39.52,22.94 40.46,22.94 40.89,23.37 40.89,26.82 40.87,26.82 40.77,26.92 | 54.69,24.43 54.48,24.64 54.48,27.69 54.74,27.94 | 54.74,27.94 54.48,28.19 54.48,30.23 54.69,30.43 IC201.19 55.75,30.48 | 54.74,27.94 56.64,27.94 | 56.64,27.94 56.9,28.19 56.9,30.23 56.69,30.43 55.73,30.43 | IC202.2 29.59,28.45 29.34,28.19 29.34,26.8 29.64,26.49 IC202.5 | 54.3,39.7 C216.2 | 51.69,38.86 50.04,38.86 | 51.69,38.86 57.02,38.86 | 51.69,38.86 51.69,36.83 52.12,36.4 52.12,34.34 | 28.96,19.56 28.96,16.38 29.21,16.13 34.67,16.13 40.13,16.13 | 47.12,16.89 47.12,20.32 47.12,20.57 | 50.11,18.21 50.11,20.5 | 7.62,7.54 7.72,7.54 R411.1 | IC404.2 10.87,21.29 11.18,21.59 | 53.14,18.11 53.14,20.5 | 8.64,15.95 8.64,14.81 9.4,14.05 | IC201.7 55.88,24.43 | 57.86,43.94 56.64,43.94 56.44,43.74 C203.2 | R418.1 R419.1 | SV401.3 10.01,46.97 TP18.TP | IC201.14 56.63,27.93 56.64,27.94
  Top 0.61: v29.84,38.48 29.84,40.89 | v33.66,38.48 33.66,40.89 | v37.47,38.48 37.47,40.89
  other vias: 41.15,27.94 20.32,9.14 9.91,32.38 12.57,30.61 10.54,18.92 44.83,25.53 51.18,26.04 40.64,34.42 47.88,42.8 57.4,38.86 59.82,35.18 34.54,27.81 26.92,32.26 26.54,34.67 1.4,26.92 1.4,36.2 9.91,36.45 4.57,36.45 5.84,32.38 12.57,32.38 5.84,30.61 15.62,32.38 33.4,22.23 1.78,7.62 1.78,10.79 48.13,38.61 6.73,4.83 7.11,10.67 18.16,7.87 12.32,18.92 8.76,18.92 11.43,26.67
  pour Bottom (isolate 0.254): 0,0 68.33,0 68.58,40.64 68.33,40.89 68.33,53.98 0,53.98
  pour Top (isolate 0.254): 0,53.34 0,0 68.58,0 68.58,38.1 66.04,40.64 66.04,52.07 64.77,53.34
MISO  (1 unrouted)
MOSI  (1 unrouted)
MUX_HI  (via drill 0.51)  (2 unrouted)
  Top 0.203: 50.62,35.53 50.62,34.34 v51.31,33.66 | IC403.12 4.6,7.52 v4.7,7.62
  Bottom 0.203: v51.31,33.66 47.75,30.1 45.09,30.1 41.4,26.42 32.51,26.42 v20.32,26.92 15.62,22.23 6.1,22.23 4.7,20.83 v4.7,7.62
MUX_LO  (via drill 0.51)  (2 unrouted)
  Top 0.203: IC201.33 50.11,33.58 v49.91,33.47 | 3.28,12.14 3.28,10.9 v3.17,10.79
  Bottom 0.203: v49.91,33.47 49.85,33.21 47.24,30.61 44.96,30.61 41.27,26.92 33.4,26.92 v20.32,29.46 14.99,24.13 13.97,24.13 6.22,24.38 3.3,21.46 3.3,10.92 v3.17,10.79
N$1  (2 unrouted)
  Top 0.203: IC202.9 29.44,23.9 29.34,24 29.34,25.22 28.4,26.16
N$3  (2 unrouted)
  Top 0.203: 47.19,37.31 47.19,38 R204.1
N$4  (4 unrouted)
  Top 0.203: C203.1 R203.1 53.14,42.67 49.91,42.67 48.13,40.89 IC203.2
N$9  (4 unrouted)
  Top 0.203: 28.4,29.72 28.4,27.76 27.56,26.92 27.56,25.22 28.4,24.38 28.4,24.31 29.46,23.24 IC202.10
N$14  (3 unrouted)
  Top 0.203: 18.36,10.67 18.36,11.61 17.6,12.37 R402.2 14.81,14.05 14.73,14.05
N$16  (2 unrouted)
  Top 0.203: IC403.11 3.94,4.83 4.06,4.7 4.06,3.76
N$17  (via drill 0.51)  (3 unrouted)
  Top 0.203: 15.37,37.64 16.05,37.64 16.76,38.35 16.76,40.64 v16.13,41.27 11.94,41.27 11.43,41.78 TP16.TP 11.43,48.01 10.87,48.57 SV401.1 | 14.86,25.48 14.86,25.53 13.97,26.42 v13.08,26.42 13.08,25.48
  Bottom 0.203: v16.13,41.27 7.62,41.27 3.56,37.21 3.56,27.56 5.59,25.53 12.19,25.53 v13.08,26.42
N$20  (3 unrouted)
  Top 0.203: D406.3 D404.1 5.33,21.46 5.33,22.66 C404.2
N$23  (2 unrouted)
  Top 0.203: 11.51,20.55 11.51,20.78 12.45,21.72 12.45,22.48 13.08,23.11 R404.2
N$24  (2 unrouted)
  Top 0.203: IC404.7 10.87,16.82 11.18,16.51 11.18,15.62 12.06,14.73 12.06,13.26 R409.2
N$25  (via drill 0.51)  (6 unrouted)
  Top 0.203: IC403.9 3.28,6.15 3.28,7.52 v3.17,7.62 3.17,8.64 4.6,10.06 IC403.3 IC403.2 | 17.73,6.15 17.73,5.16 17.27,4.7 14.86,4.7 v14.73,4.83 14.73,3.76
  Bottom 0.203: v14.73,4.83 12.19,2.29 5.21,2.29 3.17,4.32 v3.17,7.62
N$28  (2 unrouted)
  Top 0.203: IC404.6 10.21,16.82 9.91,16.51 9.91,15.32 11.18,14.05
N$29  (3 unrouted)
  Top 0.203: R417.2 R419.2 9.53,23.24 9.91,22.86 9.91,21.59 10.21,21.29 IC404.3
N$30  (2 unrouted)
  Top 0.203: D401.1 14.78,22.91 14.86,22.99 C403.2
N$32  (2 unrouted)
  Top 0.203: IC403.4 3.94,12.95 4.19,13.21 6.78,13.21 C408.2
N$33  (via drill 0.51)  (5 unrouted)
  Top 0.203: v6.48,36.58 6.48,37.64 | v4.7,29.97 3.81,29.84 3.56,29.59 3.56,28.7 | v4.7,29.97 5.97,29.84 | 5.97,29.84 7.11,29.84 7.47,29.49 IC501.18 | IC501.14 4.88,29.79 v4.7,29.97 | IC501.16 6.17,29.77 5.97,29.84
  Bottom 0.203: v6.48,36.58 4.83,34.92 v4.7,29.97
N$34  (via drill 0.51)  (5 unrouted)
  Top 0.203: 13.97,29.72 v13.97,30.61 | v13.59,36.58 13.59,37.64 | 11.56,29.72 10.54,29.72 10.29,29.46 10.29,28.7 | 11.56,29.72 12.95,29.72 | 12.95,29.72 13.97,29.72 | IC502.18 14.2,29.49 13.97,29.72 | IC502.16 12.9,29.67 12.95,29.72 | IC502.14 11.61,29.67 11.56,29.72
  Bottom 0.203: v13.97,30.61 13.97,36.2 v13.59,36.58
N$40  (3 unrouted)
  Top 0.203: R420.2 R418.2 8.64,22.91 8.64,21.72 9.58,20.78 IC404.4
N$41  (4 unrouted)
  Top 0.203: 8.26,37.64 8.18,37.64 7.47,36.93 7.47,35.81 | 6.22,35.81 5.08,35.81 4.88,35.61 IC501.7 | 6.22,35.81 7.47,35.81 | IC501.5 6.17,35.76 6.22,35.81 | 7.47,35.81 IC501.3
N$42  (4 unrouted)
  Top 0.203: IC502.7 11.61,35.61 11.81,35.81 | 11.81,35.81 12.83,35.81 | 12.83,35.81 13.97,35.81 14.2,35.59 IC502.3 | IC502.5 12.9,35.74 12.83,35.81 | 11.81,35.81 11.81,37.64
N$43  (via drill 0.51)  (4 unrouted)
  Top 0.203: C402.1 2.87,39.32 | v2.79,36.2 2.03,36.96 2.03,38.43 C402.1 | C402.1 4.88,41.27 8.51,41.27 9.02,41.78 TP17.TP 9.02,44.96 7.87,46.1 6.95,46.1 SV401.4 | 11.3,25.48 10.46,24.64 6.81,24.64 5.97,25.48 4.12,25.48 v2.79,26.8
  Bottom 0.203: v2.79,36.2 3.05,35.94 3.05,27.05 v2.79,26.8
N$44  (2 unrouted)
  Top 0.203: 3.56,34.8 3.56,36.5 4.7,37.64
N$45  (2 unrouted)
  Top 0.203: 10.03,37.62 10.03,37.64 10.79,36.88 10.79,36.07 10.29,35.56 10.29,34.8
N$52  (3 unrouted)
  Top 0.203: 11.18,2.08 11.25,2.08 12.95,3.76 13.84,4.65 13.84,5.21 14.22,5.59 15.37,5.59 15.75,5.21 16.89,5.21 17.07,5.38 17.07,6.15
PCK0  (via drill 0.36)
  Top 0.178: IC201.88 47.61,18.11 v47.88,17.84
  Bottom 0.178: WIN3.3 55.94,2.6 55.94,4.45 54.86,5.52 52.01,5.52 47.88,9.65 v47.88,17.84
PWR_HI  (via drill 0.51)  (10 unrouted)
  Top 0.203: 39.52,32.44 40.72,32.44 v41.15,32 | v6.86,33.27 7.62,33.27 8.13,33.78 IC501.2 | v6.86,33.27 5.59,33.27 | 5.59,33.27 4.57,33.27 4.22,33.63 IC501.8 | IC501.11 2.92,27.81 3.56,27.18 9.91,27.18 10.41,27.69 10.92,27.69 | 6.81,34.8 6.81,33.33 v6.86,33.27 | IC501.6 5.51,33.35 5.59,33.27 | 10.92,27.69 12.19,27.69 | IC502.15 12.24,27.74 12.19,27.69 | IC502.13 10.95,27.71 10.92,27.69 | v20.32,32 19.18,30.86 19.18,28.07 18.16,27.05 15.06,27.05 14.43,27.69 13.46,27.69 | 12.19,27.69 13.46,27.69 | 13.54,28.7 13.54,27.76 13.46,27.69
  Bottom 0.203: v20.32,32 29.59,28.57 40.77,28.57 41.91,29.72 41.91,31.24 v41.15,32 | v10.03,27.3 8.26,27.3 6.6,28.96 6.6,33.02 v6.86,33.27
PWR_LO  (via drill 0.51)  (9 unrouted)
  Top 0.203: 5.59,27.69 4.57,27.69 4.22,28.04 IC501.13 | 5.59,27.69 6.86,27.69 | 6.86,27.69 9.27,27.69 9.65,28.07 9.65,30.35 v9.91,30.61 | 39.52,31.93 38.68,31.93 38.35,32.26 38.35,34.16 v38.61,34.42 | 6.81,28.7 6.81,27.74 6.86,27.69 | IC501.15 5.51,27.76 5.59,27.69 | 12.19,33.27 13.59,33.27 | 13.59,33.27 14.61,33.27 14.86,33.53 14.86,36.32 15.24,36.7 16,36.7 17.27,37.97 v17.27,44.32 | IC502.6 12.24,33.33 12.19,33.27 | 13.54,34.8 13.54,33.33 13.59,33.27 | 12.19,33.27 v11.43,33.27 10.95,33.76 IC502.8
  Bottom 0.203: v17.27,44.32 17.65,44.7 v20.32,44.7 25.53,39.62 31.5,34.04 38.23,34.04 v38.61,34.42 | v9.91,30.61 11.43,32.13 v11.43,33.27
PWR_OE1  (via drill 0.51)  (2 unrouted)
  Top 0.203: 39.52,30.43 40.82,30.43 v41.15,30.1 | IC501.1 8.76,35.94 v8.26,36.45
  Bottom 0.203: v8.26,36.45 9.65,37.85 16,37.85 v20.32,42.16 31.11,33.47 35.56,31.37 v41.15,30.1
PWR_OE2  (via drill 0.51)  (2 unrouted)
  Top 0.203: 39.52,29.92 38.41,29.92 36.83,31.5 v32.89,31.5 | IC502.1 15.49,35.69 v15.75,35.94
  Bottom 0.203: v15.75,35.94 16.64,35.94 v20.32,39.62 20.45,39.62 28.45,34.48 v32.89,31.5
PWR_OE3  (via drill 0.51)  (2 unrouted)
  Top 0.203: 39.52,28.93 38.63,28.93 36.83,30.73 v34.29,30.73 | IC501.19 8.13,30.35 v7.87,30.61
  Bottom 0.203: v34.29,30.73 31.75,30.73 v20.32,37.08 16.89,33.66 16.89,30.23 15.24,28.57 9.91,28.57 v7.87,30.61
PWR_OE4  (via drill 0.51)  (2 unrouted)
  Top 0.203: v20.32,34.54 18.67,32.89 18.67,28.57 17.65,27.56 15.24,27.56 14.86,27.94 IC502.19 | 39.52,28.42 38.51,28.42 36.96,29.97 v36.07,29.97
  Bottom 0.203: v20.32,34.54 28.45,30.23 35.69,29.59 v36.07,29.97
PWR_ON  (via drill 0.51)  (2 unrouted)
  Top 0.178: 41.66,47.24 35.71,43.84 35.71,39.78 35.72,39.78 IC106.3 | 41.66,47.24 U$4.8 | 41.66,47.24 R102.1
  Top 0.203: 28.91,39.78 28.09,39.78 v28.07,39.75 | v35.69,39.75 35.71,39.78 | 32.72,39.78 31.9,39.78 v31.88,39.75
  Bottom 0.203: v28.07,39.75 v31.88,39.75 v35.69,39.75
SSP_DIN  (via drill 0.51)  (1 unrouted)
  Top 0.203: 45.14,19.33 45.14,20.88 v45.47,21.21
  Bottom 0.203: 45.21,18.67 45.85,19.3 45.85,20.83 v45.47,21.21
VDD  (3 unrouted)
  Top 0.178: 33.91,16.97 32.14,16.97 C205.1 30.15,16.98 U201.1 | 35.74,25.2 arc90 34.67,24.13 34.67,24
  Top 0.203: 35.74,25.2 IC202.18 | 34.67,24 34.67,20.83 33.91,19.94 33.91,16.97 | 30.1,17.02 30.15,16.97

## Text on the board
tPlace: VBAT | PLO | POE1 | POE2 | POE3 | POE4 | PHI | MXLO | MXHI | ADCIN | 3V0 | XLO | XHI | AMPLO | AMPHI | GND
tNames: 9 | 8 | 7 | 6 | 5 | 4 | 3 | 2 | 1 | 0 | 13 | 12 | 11 | 10 | GND | AREF | RST | 3V3 | 5V | GND | Vin | 0 | 1 | 2 | 3 | 4 | 5